# EAGLE board untitled (EAGLE 9.6.2)
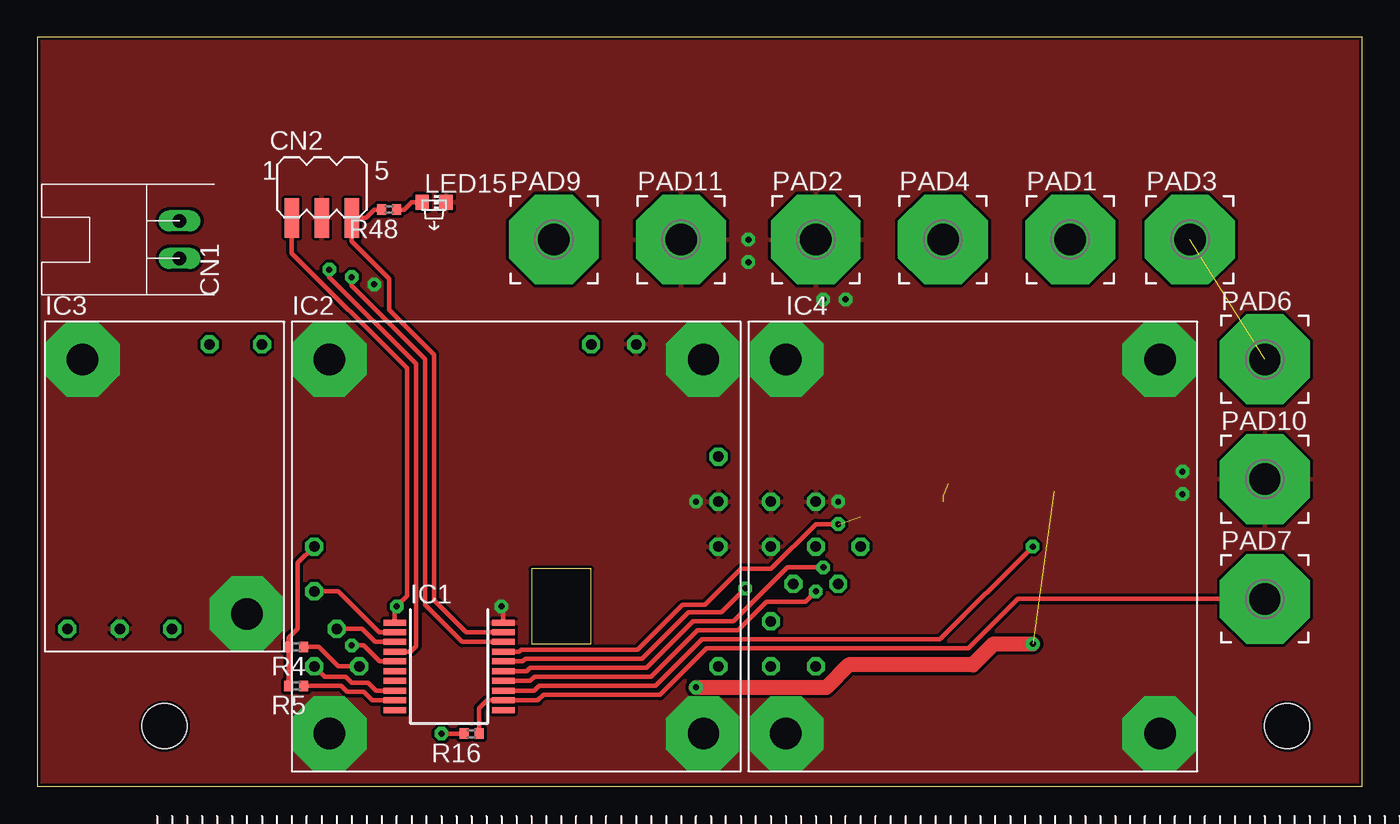
[diagram p0: board, top side]
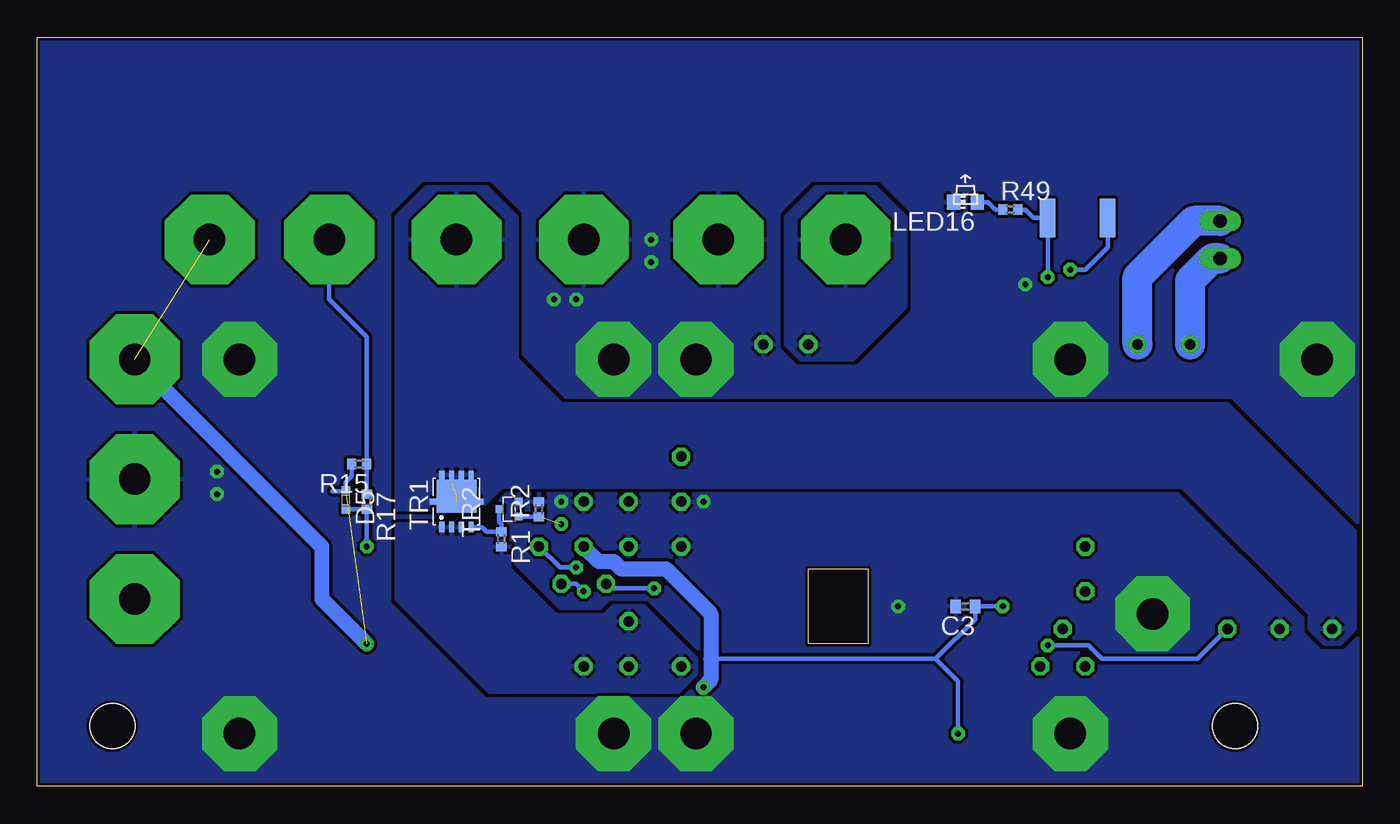
[diagram p1: board, bottom side, seen from below]

Size 88.5 x 50 mm. Coordinates in mm from the lower left corner, seen from the top.
Outline: 0,0 88.5,0 88.5,50 0,50 0,0
Copper layers (1*16): Top 0.035mm / dielectric 1.5mm / Bottom 0.035mm
Design rules "SeeedStudio_2layer_DRU_no_angle_20210220": minimum track width 0.2mm, minimum drill 0.3mm, track to track 0.21mm, track to pad 0.21mm, pad to pad 0.21mm, via to via 0.21mm, smd to smd 0.00508125mm, copper to edge 0.2mm, drill to drill 10mil, minimum pad ring 0.25mm, minimum via ring 0.2mm, stop-mask expansion 0.03mm, vias tented up to drill 5mm, thermal gap 0.21mm
Holes 3 mm at 8.5,4 83.5,4

## Footprints (pad centres in the part's own frame; a part is rotated, then mirrored left to right if it is on the bottom)
C0402 = smd 0.7 x 0.9: 1 -0.65,0; 2 0.65,0
XH-2_S = drill 0.9 long: 1 1.25,0; 2 -1.25,0
MINI-ICSP_EDGE = smd 1 x 2.6: GND 0,-2.05; PGD 2,-2.05; VCC -2,-2.05 | smd 1 x 2.6 bottom: PGC 2,-2.05; VPP -2,-2.05
VMN2 = smd 0.65 x 0.55: A 0.6,0; C -0.6,0
SSOP20 = smd 0.4 x 1.5: 1 -2.925,-3.625; 2 -2.275,-3.625; 3 -1.625,-3.625; 4 -0.975,-3.625; 5 -0.325,-3.625; 6 0.325,-3.625; 7 0.975,-3.625; 8 1.625,-3.625; 9 2.275,-3.625; 10 2.925,-3.625; 11 2.925,3.625; 12 2.275,3.625; 13 1.625,3.625; 14 0.975,3.625; 15 0.325,3.625; 16 -0.325,3.625; 17 -0.975,3.625; 18 -1.625,3.625; 19 -2.275,3.625; 20 -2.925,3.625
MAX17435_BOARD = drill 0.7 octagon: !ACOK -13.5,-8; BAT 13.5,-8; CHG 5,13.5; EN -13.5,0; GND 13.5,3; GND@1 13.5,0; GND@2 8,13.5; LDO -10.5,-8; LOAD 13.5,6; SCL -13.5,-3; SDA -12,-5.5 | drill 2.1 pad 5 octagon: GND@3 -12.5,12.5; GND@4 12.5,12.5; GND@5 12.5,-12.5; GND@6 -12.5,-12.5
LED_DRIVER_LED2001_4A = drill 0.7 octagon: DIM 0.5,-9.5; GND -3,-9.5; LED+ 6.5,9.5; LED- 3,9.5; V+ -6.5,-9.5 | drill 2.1 pad 5 octagon: GND@1 -5.5,8.5; GND@2 5.5,-8.5
MAX17320_BOARD = drill 0.7 octagon: ALRT -12,-2.5; AOLDO -10.5,0; BAT -13.5,-5; BAT@1 -10.5,-8; BAT@2 -13.5,-8; GND -13.5,0; GND@1 -10.5,3; GND@2 -13.5,3; SCL/OD -9,-2.5; SDA/DQ -7.5,0 | drill 2.1 pad 5 octagon: GND@3 -12.5,12.5; GND@4 12.5,12.5; GND@5 12.5,-12.5; GND@6 -12.5,-12.5
CHIP-LED1606(SIDE) = smd 1 x 0.9: A 0,-0.8; C 0,0.8
6.0/2.1 = drill 2.1 pad 6 octagon: 1 0,0
R0402 = smd 0.6 x 0.7: 1 -0.5,0; 2 0.5,0
TSON_ADVANCE = smd 0.35 x 0.7: 1 -0.975,-1.7; 2 -0.325,-1.7; 3 0.325,-1.7; 4 0.975,-1.7 | smd 0.35 x 1.7: 5 0.975,1.2; 6 0.325,1.2; 7 -0.325,1.2; 8 -0.975,1.2 | smd 0.35 x 0.5: 5_ 0.975,1.8; 8_ -0.975,1.8 | smd 2.65 x 2.2: EP 0,0.35 | smd 3.6 x 0.4: EP2 0,0
SOT523 = smd 0.5 x 0.5: 1 -0.5,-0.65; 2 0.5,-0.65; 3 0,0.65

## Placement (x,y rotation side)
C3  0.1u  [C0402]  26.5,12 180 bottom
CN1  [XH-2_S]  9.5,36.5 90 top
CN2  ICSPEDGE  [MINI-ICSP_EDGE]  19,40 0 top
D5  [VMN2]  67.9,19.1 270 bottom
IC1  PIC16LF1769SS  [SSOP20]  27.5,8 270 top
IC2  MAX17435_BOARD  [MAX17435_BOARD]  32,16 0 top
IC3  LED_DRIVER_LED2001_4A  [LED_DRIVER_LED2001_4A]  8.5,20 0 top
IC4  MAX17320_BOARD  [MAX17320_BOARD]  62.5,16 0 top
LED15  Red  [CHIP-LED1606(SIDE)]  26.5,39 270 top
LED16  Green  [CHIP-LED1606(SIDE)]  26.5,39 90 bottom
PAD1  WIREPAD6.0/2.1  [6.0/2.1]  69,36.5 0 top
PAD2  WIREPAD6.0/2.1  [6.0/2.1]  52,36.5 0 top
PAD3  WIREPAD6.0/2.1  [6.0/2.1]  77,36.5 0 top
PAD4  WIREPAD6.0/2.1  [6.0/2.1]  60.5,36.5 0 top
PAD6  WIREPAD6.0/2.1  [6.0/2.1]  82,28.5 0 top
PAD7  WIREPAD6.0/2.1  [6.0/2.1]  82,12.5 0 top
PAD9  WIREPAD6.0/2.1  [6.0/2.1]  34.5,36.5 0 top
PAD10  WIREPAD6.0/2.1  [6.0/2.1]  82,20.5 0 top
PAD11  WIREPAD6.0/2.1  [6.0/2.1]  43,36.5 0 top
R1  100k  [R0402]  57.5,16.5 270 bottom
R2  100k  [R0402]  55,18.5 90 bottom
R4  10k  [R0402]  17.3,9.3 180 top
R5  xxx  [R0402]  17.3,6.7 180 top
R15  10k  [R0402]  67,21.5 180 bottom
R16  15k  [R0402]  29,3.5 180 top
R17  1k  [R0402]  66.5,19 270 bottom
R48  330  [R0402]  23.5,38.5 180 top
R49  330  [R0402]  23.5,38.5 0 bottom
TR1  MOSFET_PTSON  [TSON_ADVANCE]  60.5,19 0 bottom
TR2  MOSFET_NSOT523  [SOT523]  57,18.5 90 bottom
U$1  [RULER]  8,-5 0 top  (outside the outline)
U$2  [RULER-S]  -5.5,0 90 top  (outside the outline)

## Library data of the parts
C3 = rcl; SPICEPREFIX: C
CN1 = 4 CONNECTOR
CN2 IC1-IC4 LED15 LED16 TR1 TR2 U$1 U$2 = 0 my parts
D5 = 5 D
PAD1-PAD4 PAD6 PAD7 PAD9-PAD11 = 4 PAD
R1 R2 R4 R5 R15-R17 R48 R49 = rcl; SPICEPREFIX: R

## Nets
GND: C3.2 CN2.GND IC1.20 IC2.GND IC2.GND@1 IC2.GND@2 IC2.GND@3 IC2.GND@4 IC2.GND@5 IC2.GND@6 IC3.GND IC3.GND@1 IC3.GND@2 IC4.GND IC4.GND@1 IC4.GND@2 IC4.GND@3 IC4.GND@4 IC4.GND@5 IC4.GND@6 LED15.C LED16.C PAD2.1 PAD10.1 PAD11.1 R2.2 TR2.2
N$1: CN1.1 IC3.LED+
N$2: CN1.2 IC3.LED-
N$3: CN2.VPP IC1.4
N$5: IC2.CHG PAD9.1
N$7: IC1.5 IC3.DIM
N$8: IC2.BAT IC4.BAT IC4.BAT@1 IC4.BAT@2 R1.2 TR1.1 TR1.2 TR1.3
N$9: IC1.2 IC2.SCL
N$10: IC1.9 R5.1
N$11: IC1.8 IC2.!ACOK
N$12: IC1.3 IC2.SDA
N$13: R1.1 TR1.4 TR2.3
N$14: CN2.PGD IC1.19 R48.2
N$15: IC1.17 R2.1 TR2.1
N$16: CN2.PGC IC1.18 R49.2
N$17: IC2.LOAD
N$18: IC2.LDO R4.1
N$19: IC1.15 IC4.SDA/DQ
N$20: IC1.16 IC4.ALRT
N$21: IC1.14 IC4.SCL/OD
N$22: IC2.EN R4.2 R5.2
N$23: D5.A IC1.13 R17.2
N$31: IC1.12 PAD7.1 R16.1
N$57: PAD1.1 R15.1 R17.1
N$103: LED15.A R48.1
N$104: LED16.A R49.1
V+: IC3.V+ PAD4.1 TR1.5 TR1.5_ TR1.6 TR1.7 TR1.8 TR1.8_ TR1.EP TR1.EP2
VDD: C3.1 CN2.VCC D5.C IC1.1 IC4.AOLDO PAD3.1 PAD6.1 R15.2 R16.2

## Tracks (layer width: path | path; a pad name or v marks a point on that pad's centre or on a via)
GND  (via drill 0.4 pad 0.9)
  Top 0.3: IC1.20 31.12,11.88 v31,12
  other vias: 53.5,19 44,19 47.5,36.5 47.5,35 22.5,33.5 76.5,21 76.5,19.5 54,32.5 52.5,32.5
  pour Bottom (rank 6): -0.5,50 88.5,50 88.5,0 -0.5,0
  pour Top (rank 6): 88.5,50 -0.5,50 -0.5,0 88.5,0
N$1
  Bottom 2: CN1.1 11.25,37.75 15,34 IC3.LED+
N$2
  Bottom 2: CN1.2 10,35.25 11.5,33.75 IC3.LED-
N$3  (via drill 0.4 pad 0.9)
  Top 0.3: IC1.4 24.92,8.97 25.3,9.36 25.3,28.2 19.5,34 v19.5,34.5
  Bottom 0.3: CN2.VPP 17,36 18.5,34.5 v19.5,34.5
N$5
  pour Bottom (rank 2): 32.5,40 30.5,38 30.5,32 34,28.5 37.5,28.5 38.5,29.5 38.5,38 36.5,40
N$7  (via drill 0.4 pad 0.9)
  Top 0.3: IC1.5 22.88,8.32 21.8,9.4 v21,9.4
  Bottom 0.3: v21,9.4 18.3,9.4 17.4,8.5 11,8.5 IC3.DIM
N$8
  pour Bottom (rank 2): 57,14.5 53.9,11.4 50.6,11.4 50,12 48,12 44.5,8.5 44.5,7.5 45.7,6.3 58.3,6.3 64.5,12.5 64.5,17.5 57,17.5
N$9
  Top 0.3: IC2.SCL 20.1,13 22.82,10.28 IC1.2
N$10
  Top 0.3: R5.1 20.3,6.7 20.7,6.3 21.8,6.3 22.38,5.72 IC1.9
N$11
  Top 0.3: IC1.8 22.62,6.38 22.1,6.9 21,6.9 20.6,7.3 19.2,7.3 IC2.!ACOK
N$12
  Top 0.3: IC2.SDA 21.7,10.5 22.57,9.62 IC1.3
N$13
  Bottom 0.3: TR1.4 58.8,17.3 58.5,17 R1.1 57.5,17.5 57.65,17.65 TR2.3
N$14
  Top 0.3: IC1.19 28.62,10.28 26.5,12.4 26.5,28.8 23.5,31.8 23.5,33.9 21,36.4 CN2.PGD 21.95,37.95 22.5,38.5 R48.2
N$15  (via drill 0.4 pad 0.9)  (1 unrouted)
  Top 0.3: v53.5,17.5 52,17.5 49,14.5 47,14.5 44.61,12.11 43.11,12.11 40.1,9.1 32.3,9.1 32.17,8.97 IC1.17
  Bottom 0.3: TR2.1 R2.1
N$16  (via drill 0.4 pad 0.9)
  Top 0.3: v21,34 21,33.4 25.9,28.5 25.9,12.1 28.38,9.62 IC1.18
  Bottom 0.3: v21,34 CN2.PGC 21.95,37.95 22.5,38.5 R49.2
N$18
  Top 0.3: R4.1 18.8,9.3 20.1,8 IC2.LDO
N$19  (via drill 0.4 pad 0.9)
  Top 0.3: v52.5,14.6 50.1,14.6 46.5,11 43.8,11 40.7,7.9 32.9,7.9 32.67,7.67 IC1.15
  Bottom 0.3: IC4.SDA/DQ 53.6,14.6 v52.5,14.6
N$20  (via drill 0.4 pad 0.9)
  Top 0.3: IC1.16 32.42,8.32 32.6,8.5 40.4,8.5 43.5,11.6 45.7,11.6 v47.3,13.2
  Bottom 0.3: IC4.ALRT 50.2,13.2 v47.3,13.2
N$21  (via drill 0.4 pad 0.9)
  Top 0.3: IC1.14 32.92,7.03 33.2,7.3 41,7.3 44.1,10.4 46.8,10.4 48.7,12.3 51.3,12.3 v52,13
  Bottom 0.3: IC4.SCL/OD 52.5,13.5 v52,13
N$22
  Top 0.3: IC2.EN 17.4,14.9 17.4,10.5 16.8,9.9 R4.2 R5.2
N$23  (via drill 0.4 pad 0.9)
  Top 0.3: IC1.13 33.17,6.38 33.5,6.7 41.3,6.7 44.4,9.8 60.3,9.8 v66.5,16
  Bottom 0.3: v66.5,16 R17.2 D5.A
N$31
  Top 0.3: PAD7.1 65.5,12.5 62.2,9.2 44.7,9.2 41.6,6.1 33.8,6.1 33.42,5.72 IC1.12 30.02,5.72 29.5,5.2 R16.1
N$57
  Bottom 0.3: R17.1 R15.1 66.5,30 69,32.5 PAD1.1
N$103
  Top 0.3: R48.1 24.5,38.5 25,39 LED15.A
N$104
  Bottom 0.3: R49.1 24.5,38.5 25,39 LED16.A
V+  (2 unrouted)
  pour Bottom: 12,20 57.5,20 59,18.5 64.5,18.5 64.5,38 62.5,40 58.5,40 56.5,38 56.5,28.5 53.5,25.5 9,25.5 0.5,17 0.5,10.5 1.5,9.5 2.5,9.5 3.5,10.5 3.5,11.5
VDD  (via drill 0.4 pad 0.9)  (2 unrouted)
  Top 0.3: IC1.1 23.88,11.88 v24,12 24.7,12.7 24.7,27.9 17,35.6 CN2.VCC | R16.2 v27,3.5
  Top 1: v44,6.6 52.7,6.6 54.2,8.1 62.5,8.1 63.9,9.5 v66.5,9.5
  Bottom 0.3: 28.5,8.5 25.85,11.15 C3.1 v24,12 | 28.5,8.5 29,8.5 | 29,8.5 43.5,8.5 | R15.2 67.5,20.7 67.9,20.3 D5.C 68.8,19.7 | v27,3.5 27,7 28.5,8.5 | 29,8.5
  Bottom 1: PAD6.1 69.5,16 69.5,12.5 v66.5,9.5 | v44,6.6 43.5,7.1 43.5,8.5 43.5,11.5 46.5,14.5 49.5,14.5 50,15 51,15 IC4.AOLDO